# Altium PCB SlipSensorEvalBoard.PcbDoc
Units mm, origin at the board's own origin, x right, y up, seen from the top; angles counter-clockwise.
Board outline 12.6 x 6.9 mm, 2 copper layers (Top Layer, Bottom Layer); 10 components, 7 nets, 21 pads, 5 vias.
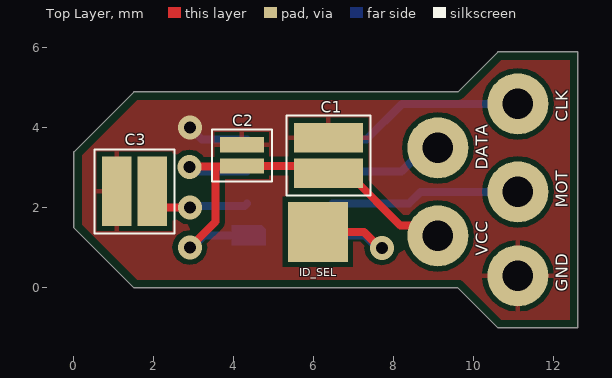
[diagram p0: Top Layer view]
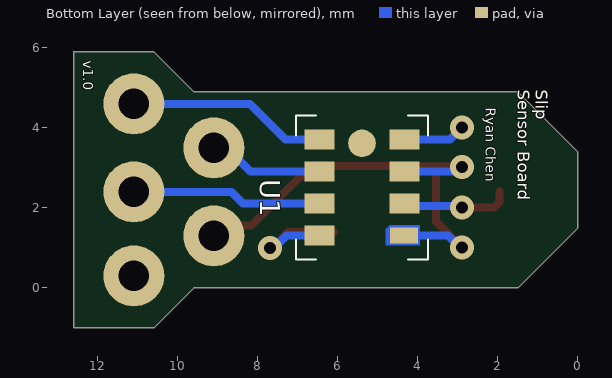
[diagram p1: Bottom Layer view, seen from below]
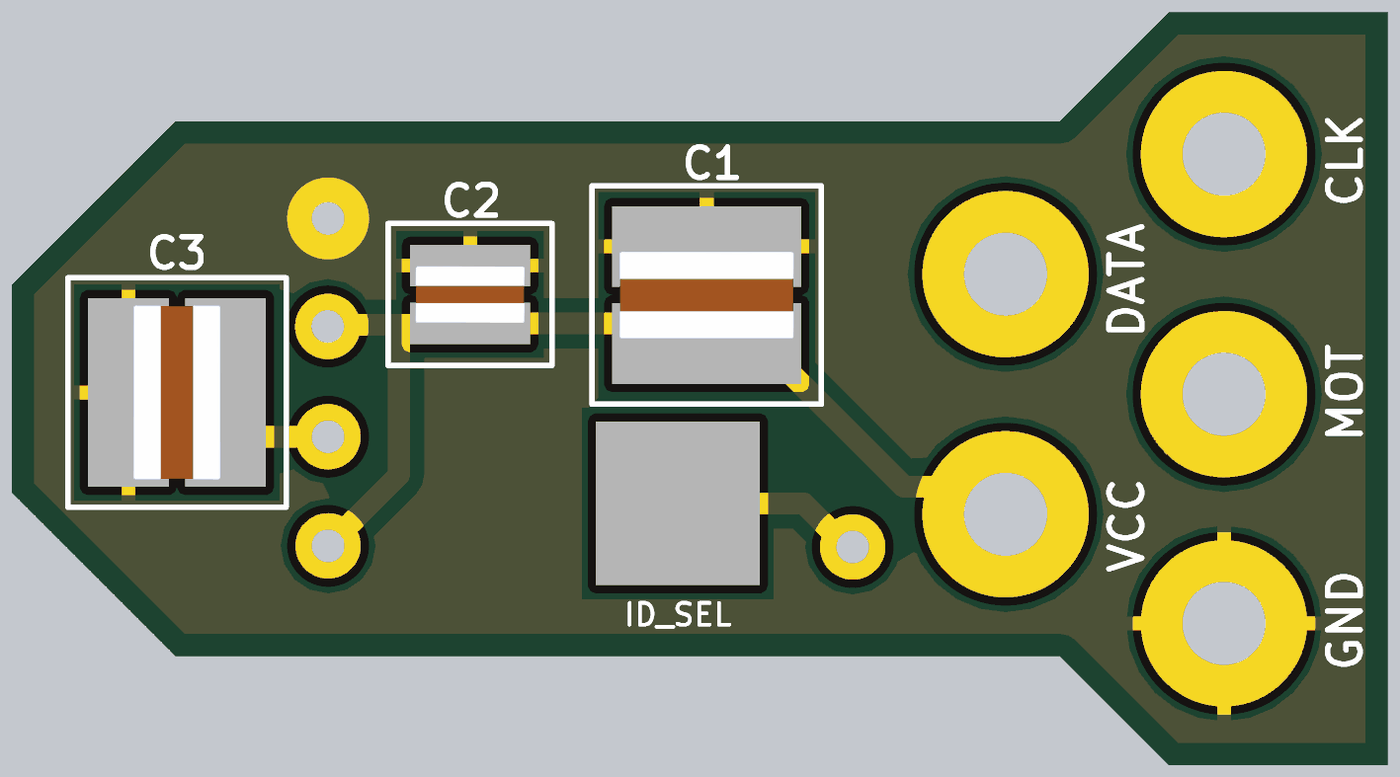
[diagram p2: 3D render of the assembled board from above, using the file's embedded part models]

## Layer stack, top to bottom
Top Solder: solder mask 0.0102, Solder Resist, Dk 3.5
Top Layer: signal copper 0.0356
Dielectric 1: dielectric 0.32, FR-4, Dk 4.8
Bottom Layer: signal copper 0.0356
Bottom Solder: solder mask 0.0102, Solder Resist, Dk 3.5

## Board outline
12.6,-1 12.6,5.9 10.6,5.9 9.6,4.9 1.5,4.9 0,3.4 0,1.5 1.5,0 9.6,0 10.6,-1

## Design rules (kind name [scope] priority, off if disabled: settings)
BoardOutlineClearance [All] p1: gap=0.2 ignorepadtopadclearanceinfootprint=FALSE
Clearance [All] p1: gap=0.127 ignorepadtopadclearanceinfootprint=FALSE except(0.25: Arc-Hole Track-Hole SMDPad-Hole THPad-Hole Via-Hole Fill-Hole Poly-Hole Region-Hole Text-Hole)
ComponentClearance [All] p1: gap=0.127 collisioncheckmode=3 verticalgap=0.127 showdistances=TRUE
DiffPairsRouting [All] p1: maxlimit=0.254 minlimit=0.127 mostfreqgap=0.127 toplayer_minwidth=0.127 toplayer_maxwidth=25.4 toplayer_prefwidth=0.127 bottomlayer_minwidth=0.127 bottomlayer_maxwidth=25.4 bottomlayer_prefwidth=0.127 maxuncoupledlength=12.7
Height [All] p1: minheight=0 maxheight=1816.048 prefheight=12.7
HoleSize [All] p1: absolutevalues=TRUE maxlimit=6.3 minlimit=0.3 maxpercent=80.000 minpercent=20.000
HoleToHoleClearance [All] p1: gap=0.25 allowstackedmicrovias=FALSE
MinimumAnnularRing [All] p1: minimumring=0.076
MinimumSolderMaskSliver [All] p1: minsoldermaskwidth=0
PlaneClearance [All] p1: clearance=0.127
PlaneConnect PlaneConnectPowerPads [InPadClass('PowerPads')] p1: planeconnectstyle=Direct reliefexpansion=0.508 reliefentries=4 reliefconductorwidth=0.254 reliefairgap=0.254
PlaneConnect [All] p2: pad.planeconnectstyle=Relief pad.reliefexpansion=0.3 pad.reliefentries=4 pad.reliefconductorwidth=0.127 pad.reliefairgap=0.127 via.planeconnectstyle=Direct via.reliefexpansion=0.3 via.reliefentries=4 via.reliefconductorwidth=0.127 via.reliefairgap=0.127
PolygonConnect PolygonConnectPowerPads [All vs (InPadClass('PowerPads'))] p1: connectstyle=Direct reliefconductorwidth=0.254 reliefentries=4 polygonreliefangle="90 Angle" airgapwidth=0.254
PolygonConnect [All] p2: thpad.connectstyle=Relief thpad.reliefconductorwidth=0.127 thpad.reliefentries=4 thpad.polygonreliefangle="90 Angle" thpad.airgapwidth=0.127 smdpad.connectstyle=Relief smdpad.reliefconductorwidth=0.127 smdpad.reliefentries=4 smdpad.polygonreliefangle="90 Angle" smdpad.airgapwidth=0.127 via.connectstyle=Direct via.reliefconductorwidth=0.127 via.reliefentries=4 via.polygonreliefangle="90 Angle" via.airgapwidth=0.127
RoomDefinition SlipSensorEvalBoard [InComponentClass('SlipSensorEvalBoard')] p1: confinementstyle=ConfineIn formatcopy=TRUE lockcomponents=FALSE outline -1.4,-0.9 13,-0.9 13,6.8 -1.4,6.8
RoutingVias [All] p1: holewidth=0.3 width=0.6 viastyle="Through Hole" minholewidth=0.3 minwidth=0.6 maxholewidth=0.6 maxwidth=6.6
SilkToSilkClearance [All] p1: silktosilkclearance=0
SilkToSolderMaskClearance [IsPad] p1: minsilkscreentomaskgap=0.127 clearancetoexposedcopper=TRUE
SolderMaskExpansion [All] p1: expansion=0.075 istentingtop=FALSE
Width [All] p1: maxlimit=25.4 minlimit=0.127 preferedwidth=0.127 minimp=50.000000 maximp=50.000000 favimp=50.000000
20 further rules are at their usual default settings.

## Components (designator, comment, footprint, x,y, rotation, side; value= is the part's Value field where it differs from the comment)
C1 "10uF" CAPC0816X55N 6.364,3.309 r270 top
C2 "0.1uF" CAP_0.1UF 4.197,3.313 r270 top
C3 "4.7uF" CAPC0816X55N 1.513,2.416 r0 top
CLK "Holepad" HOLEPAD 11.1,4.6 r90 top
DATA "Holepad" HOLEPAD 9.1,3.5 r90 top
GND "Holepad" HOLEPAD 11.1,0.3 r90 top
ID_SEL "Wirepad" WIREPAD 6.1,1.4 r90 top
MOT "Holepad" Holepad 11.1,2.4 r90 top
U1 "Optical Navigation Sensor" PAT9125 5.397,2.51 r90 bottom
VCC "Holepad" HOLEPAD 9.1,1.3 r270 top

## Footprints (in the part's own frame and the unit in brackets; to place one, negate y for a bottom-side part, rotate by r counter-clockwise, add the part's x,y. Pads: shape width x height; smd on the part's side, far side on the other; paste and mask are expansions set on the pad)
CAP_0.1UF [mm]
  rect 0.38x1.1 smd: 1(-0.265,0) 2(0.265,0)
  silkscreen extent -0.65,-0.75 0.65,0.75, body extent -0.26,-0.5 0.26,0.5, height 0.35
CAPC0816X55N [mm]
  rect 0.74x1.73 smd: 1(-0.445,0) 2(0.445,0)
  silkscreen extent -1,-1.05 1,1.05, body extent -0.4,-0.8 0.4,0.8, height 0.55
HOLEPAD [mil]
  round 60 hole 30: 1(0,0)
Holepad [mil]
  round 60 hole 30: 1(0,0)
PAT9125 [mm] "LGA, 8-Leads, Body 3.50mmx3.20mmx1.00mm, Pitch 0.80mm"
  rect 0.4x0.7 smd paste+0 mask+0: 1(-1.2,-1.05)
  rect 0.5x0.75 smd: 2(-0.4,-1.065) 3(0.4,-1.065) 4(1.2,-1.065) 5(1.2,1.065) 6(0.4,1.065) 7(-0.4,1.065) 8(-1.2,1.065)
  round 0.69 smd: 9(1.105,0)
  Top Layer region: -1.45,-1.45 -0.95,-1.45 -0.95,-0.7 -1.05,-0.6 -1.45,-0.6
  silkscreen extent -1.8,-1.65 1.8,1.65, body extent -1.75,-1.6 1.75,1.6, height 1
WIREPAD [mm] "5mmx3mm SMD pad"
  rect 1.5x1.5 smd: 1(0,0)

## Part data
C1: library part cap_10uF, "10µF ±20% 2.5V Ceramic Capacitor X6S 0306 (0816 Metric)", Package="0816 Taiyo Yuden", Category=Capacitor, Check_prices=https://www.snapeda.com/parts/PWK107C6106MV-T/Taiyo%20Yuden/view-part/2037078/?ref=eda, Digi-Key_Part_Number=587-5158-1-ND, MF="Taiyo Yuden", MP=PWK107C6106MV-T, Purchase-URL=https://pricing.snapeda.com/search/part/PWK107C6106MV-T/?ref=eda, SnapEDA_Link=https://www.snapeda.com/parts/PWK107C6106MV-T/Taiyo%20Yuden/view-part/2037078/?ref=snap
C2: library part cap_0.1uF, "0.1µF ±20% 6.3V Ceramic Capacitor X7S 0204 (0510 Metric)", Package="0510 Taiyo Yuden", Category=Capacitors, Category 2="Ceramic Capacitors", Check_prices=https://www.snapeda.com/parts/JWK105C7104MP-F/Taiyo%20Yuden/view-part/554958/?ref=eda, Digi-Key_Part_Number=587-2152-1-ND, MF="Taiyo Yuden", MP=JWK105C7104MP-F, Purchase-URL=https://pricing.snapeda.com/search/part/JWK105C7104MP-F/?ref=eda, SnapEDA_Link=https://www.snapeda.com/parts/JWK105C7104MP-F/Taiyo%20Yuden/view-part/554958/?ref=snap
C3: library part cap_4.7uF, "4.7µF ±20% 4V Ceramic Capacitor X6S 0306 (0816 Metric)", Package="0816 Taiyo Yuden", Category=Capacitor, Check_prices=https://www.snapeda.com/parts/AWK107C6475MV-T/Taiyo%20Yuden/view-part/2039935/?ref=eda, Digi-Key_Part_Number=587-5162-1-ND, MF="Taiyo Yuden", MP=AWK107C6475MV-T, Purchase-URL=https://pricing.snapeda.com/search/part/AWK107C6475MV-T/?ref=eda, SnapEDA_Link=https://www.snapeda.com/parts/AWK107C6475MV-T/Taiyo%20Yuden/view-part/2039935/?ref=snap
ID_SEL: "SMD pad to solder a wire straight onto the PCB."
U1: library part PAT9125, "Miniature Optical Navigation Chip", HelpURL=https://www.pixart.com/products-detail/72/PAT9125EL-TKIT___TKMT, Name=PAT9125

## Via types
v1: diameter 0.6, hole 0.3, Top Layer to Bottom Layer, 5 vias

## Nets (pads, with @x,y where several pads share a name; then routed paths per layer and width w, separated by ;. In a path a pad name is that pad's centre, name@x,y a point inside that pad or via, vN(x,y) a via of type N, cw(c..) or ccw(c..) an arc to the next point about the centre after c; other vN are vias at no path point)
CLK: CLK.1 U1.5 | length 5
  Bottom Layer w0.2: U1.5 7.31,3.71 8.2,4.6 CLK.1
DATA: DATA.1 U1.6 | length 2.9
  Bottom Layer w0.2: U1.6 8.188,2.91 8.778,3.5 DATA.1
GND: C1.1 C2.1 C3.1 GND.1 U1.4 | length 1.6
  Bottom Layer w0.2: v1(2.897,4.01) 3.197,3.71 U1.4
ID_SEL: ID_SEL.1 U1.8 | length 3.1
  Top Layer w0.2: ID_SEL.1 7.251,1.4 7.651,1 v1(7.7,1)
  Bottom Layer w0.2: U1.8 7.281,1.31 7.592,1 v1(7.7,1)
MOT: MOT.1 U1.7 | length 4.8
  Bottom Layer w0.2: U1.7 8.373,2.11 8.663,2.4 MOT.1
NetC3_2: C3.2 U1.2 | length 2.7
  Top Layer w0.2: C3.2 1.958,2.145 2.093,2.01 v1(2.897,2.01)
  Bottom Layer w0.2: v1(2.897,2.01) 2.935,2.048 4.27,2.048 U1.2
VCC: C1.2 C2.2 U1.1 U1.3 VCC.1 | length 12.6
  Top Layer w0.2: v1(2.894,3.021) 2.908,3.034 3.546,3.034 ; v1(2.897,1.01) 3.546,1.659 3.546,3.034 ; C1.2 C1.2@6.438,2.789 ; VCC.1 8.847,1.553 8.169,1.553 6.933,2.789 C1.2@6.438,2.789 ; 3.546,3.034 4.183,3.034 C2.2 6.179,3.048 C1.2@6.438,2.789
  Bottom Layer w0.2: v1(2.897,1.01) 2.95,1.01 3.25,1.31 U1.1 ; v1@2.932,2.983 v1(2.894,3.021) 2.947,3.021 3.057,2.91 U1.3 U1.3@4.259,2.983
pads on no net: U1.9

## Polygon pours and split planes (outlines as drawn)
GND on Top Layer "GND_L01_P000" (solid, pour order 0): 13.378,6.258 13.278,6.158 13.278,-1.842 -0.622,-1.842 -0.922,-1.542 -0.922,6.658

## Silkscreen, mask and mechanical layers (free items; w line width, h text height)
Bottom Overlay:
  text "v1.0" at 12.366,5.673 h0.25 r90
  text "Slip  / Sensor Board" at 1.5,4.95 h0.3 r90
  text "Ryan Chen" at 2.3,4.5 h0.25 r90
Mechanical 1:
  lines w0.05: 9.3,4.9 9.6,4.9 ; 9.6,4.9 10.6,5.9 12.6,5.9 12.6,-1 ; 9.6,4.9 1.5,4.9 0,3.4 0,1.5 1.5,0 9.6,0 10.6,-1 ; 10.6,-1 12.6,-1 ; 10.6,-1 12.6,-1

## Dimensions
9.4,0 to 10.6,-1 on Mechanical 16
9.6,4.9 to 10.6,5.9 on Mechanical 16
10.6,5.9 to 12.6,5.9 on Mechanical 16
12.6,-1 to 12.6,5.9 on Mechanical 16
10.6,-1 to 12.6,-1 on Mechanical 16
9.6,0 to 10.6,-1 on Mechanical 16
1.5,0 to 9.6,0 on Mechanical 16
0,3.4 to 0,1.5 on Mechanical 16
0,1.5 to 1.5,0 on Mechanical 16
1.5,0 to 0,1.5 on Mechanical 16
1.5,4.9 to 0,3.4 on Mechanical 16
1.5,4.9 to 0,3.4 on Mechanical 16
9.6,4.9 to 1.5,4.9 on Mechanical 16
9.6,4.9 to 10.6,5.9 on Mechanical 16